# Altium PCB PCB1.PcbDoc
Units mm, origin at the board's own origin, x right, y up, seen from the top; angles counter-clockwise.
Board outline 152.4 x 101.6 mm, 2 copper layers (Top Layer, Bottom Layer); 45 components, 69 nets, 276 pads, 57 vias.
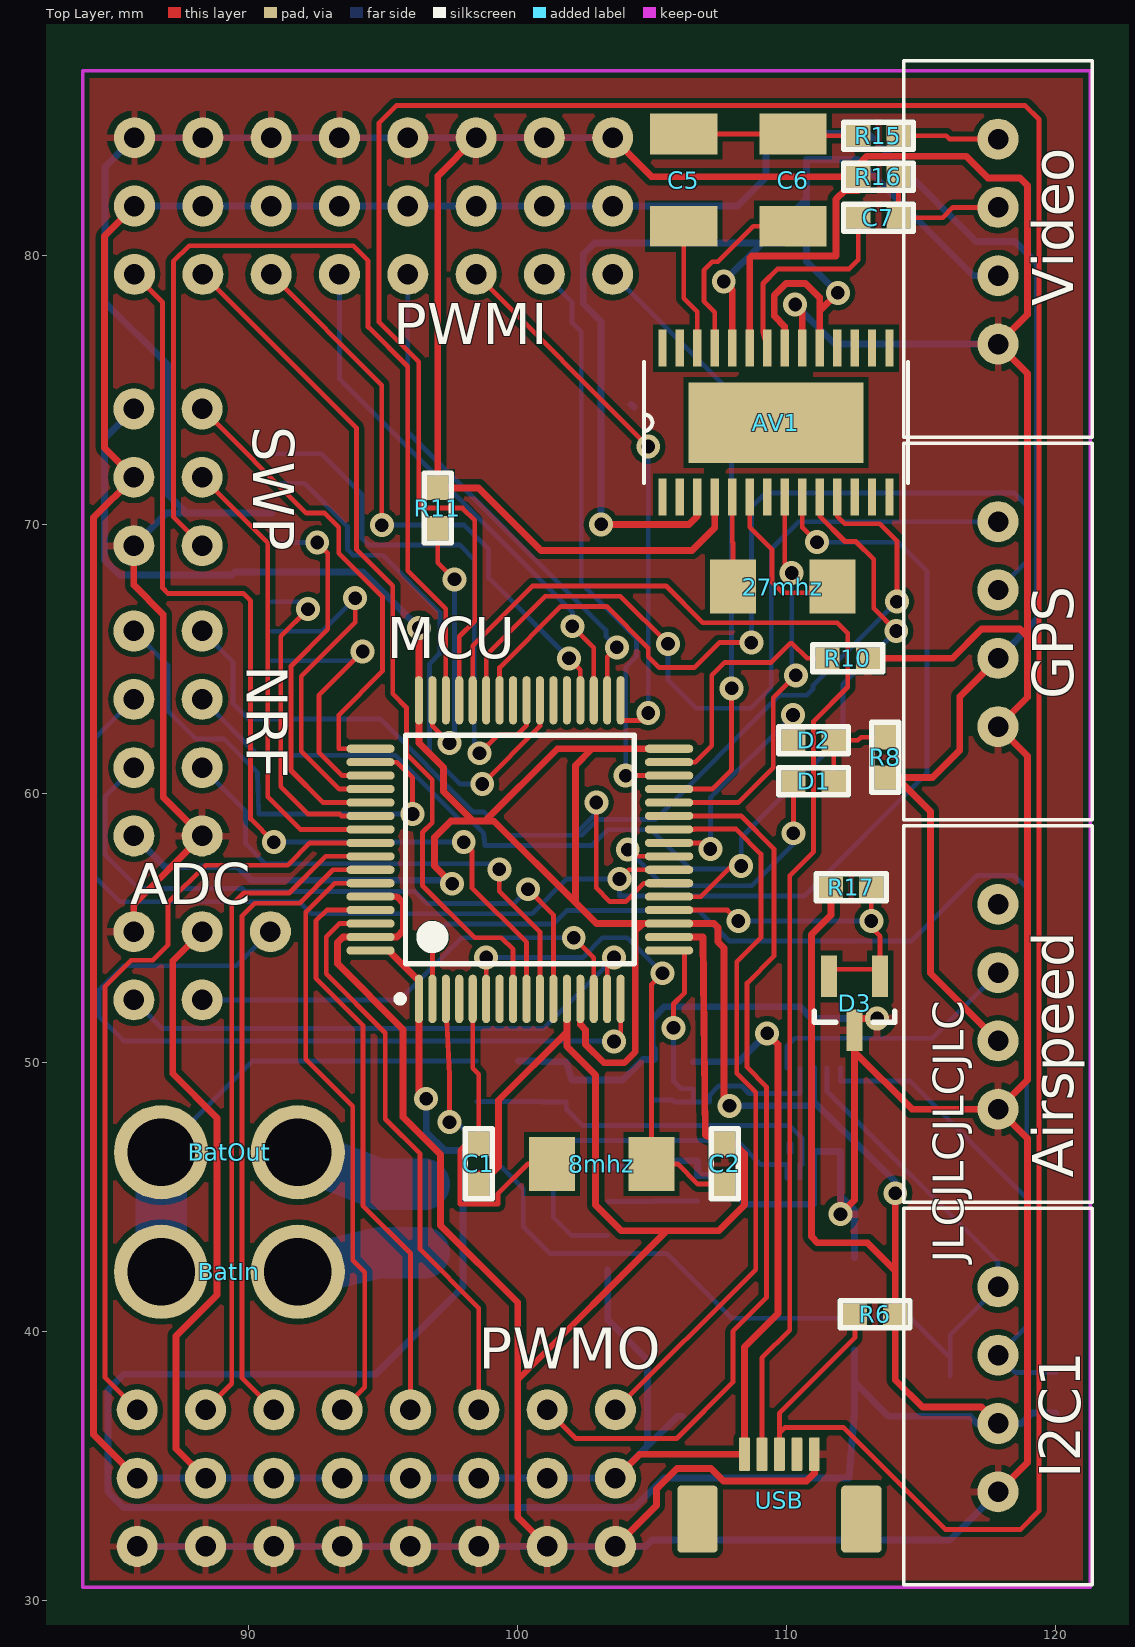
[diagram p0: Top Layer view]
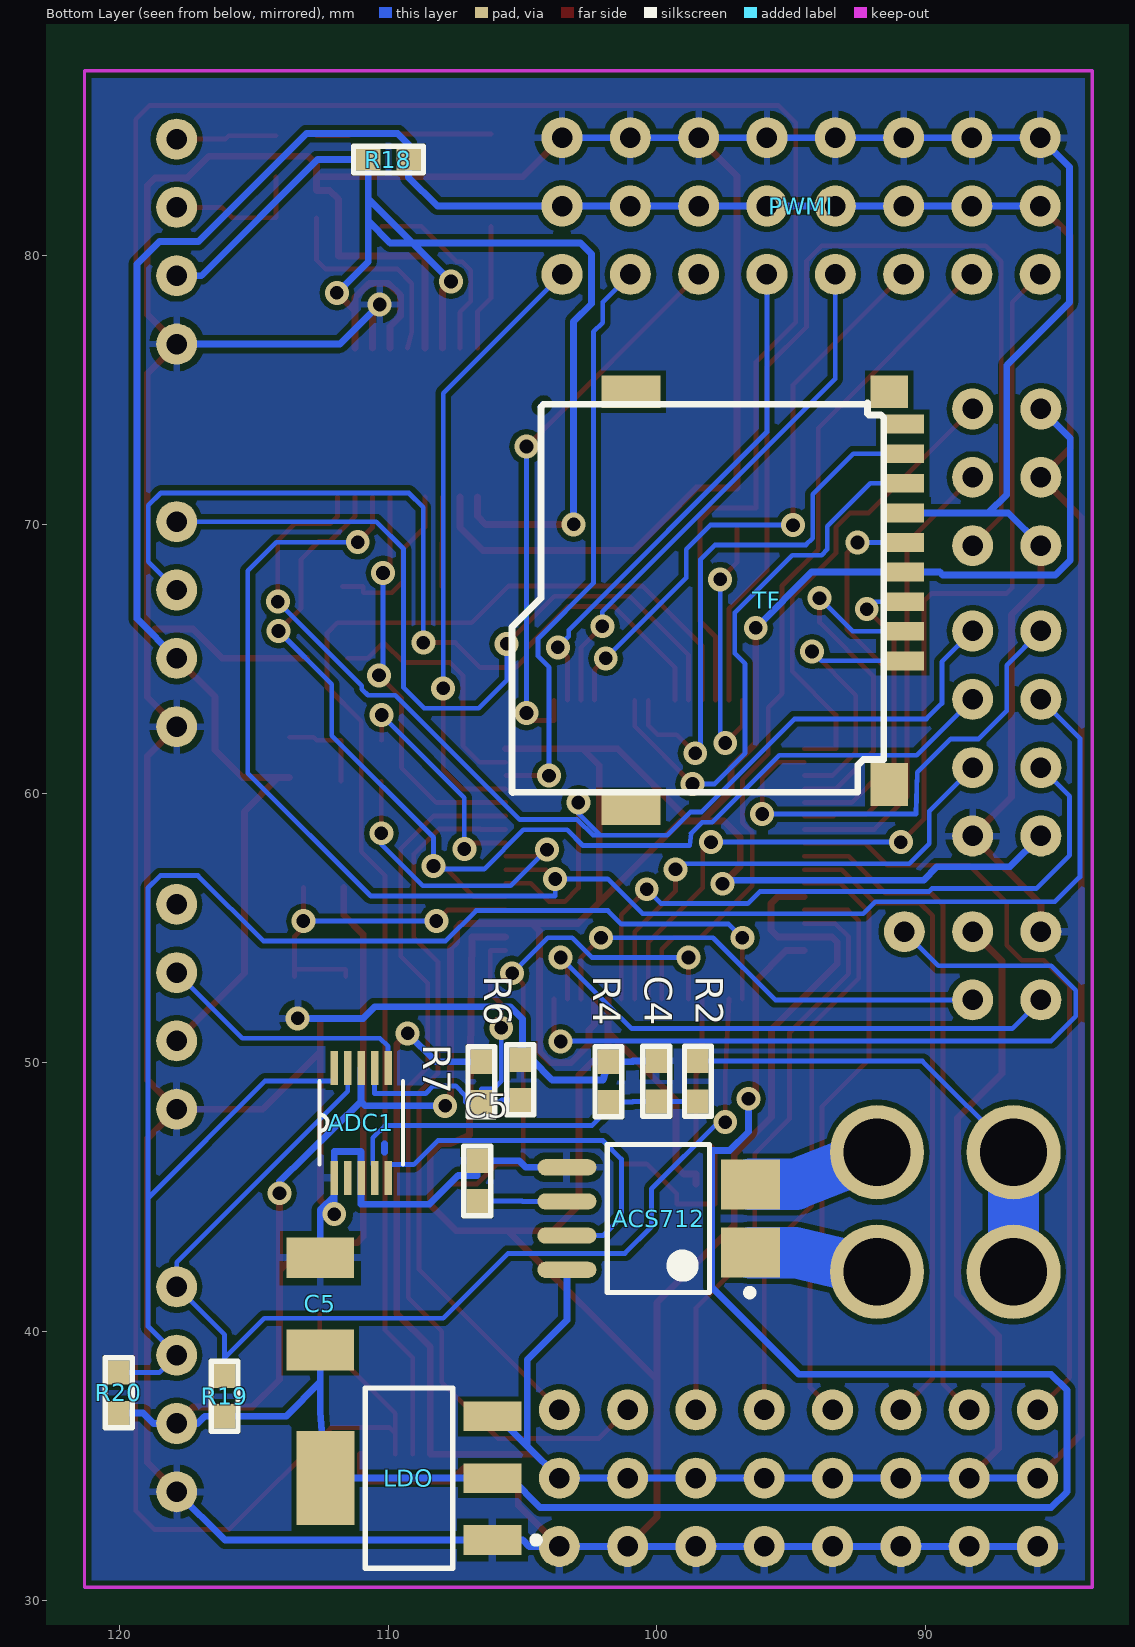
[diagram p1: Bottom Layer view, seen from below]

## Layer stack, top to bottom
Top Layer: signal copper 0.0356
Dielectric: dielectric 0.32, FR-4, Dk 4.8
Bottom Layer: signal copper 0.0356

## Board outline
25.4,25.4 177.8,25.4 177.8,127 25.4,127

## Design rules (kind name [scope] priority, off if disabled: settings)
Clearance [All] p1: gap=0.203
PolygonConnect [All] p1: connectstyle=Relief reliefconductorwidth=0.254 reliefentries=4 polygonreliefangle="90 Angle" airgapwidth=0.254
RoomDefinition Sheet1 [InComponentClass('Sheet1')] p1: confinementstyle=ConfineIn formatcopy=TRUE lockcomponents=FALSE outline 178.943,26.797 200.279,26.797 200.279,43.307 178.943,43.307
RoutingVias [All] p1: holewidth=0.508 width=0.889 viastyle="Through Hole" minholewidth=0.508 minwidth=0.889 maxholewidth=0.508 maxwidth=0.889
SolderMaskExpansion [All] p1: expansion=0.102
Width Current+ [InNet('NetACS712_I+')] p1: maxlimit=2.54 minlimit=1.524 preferedwidth=1.905
Width Current+_1 [InNet('NetACS712_I-')] p2: maxlimit=2.54 minlimit=1.524 preferedwidth=1.905
Width GND [InNet('GND')] p3: maxlimit=0.381 minlimit=0.254 preferedwidth=0.254
Width VCC [InNet('VCC')] p4: maxlimit=0.381 minlimit=0.254 preferedwidth=0.254
Width VCC5V [InNet('VCC5V')] p5: maxlimit=0.381 minlimit=0.254 preferedwidth=0.254
Width VCC5V_2 [InNet('VCC5V-2')] p6: maxlimit=0.381 minlimit=0.254 preferedwidth=0.254
Width [All] p7: maxlimit=1.524 minlimit=0.152 preferedwidth=0.178 checkconnectedcopper=TRUE
28 further rules are at their usual default settings.

## Classes and differential pairs
component class Sheet1: 8mhz 27mhz ACS712 ADC ADC1 Airspeed AV1 BatIn BatOut C1 C2 C4 C5 C6 C7 D1 D2 D3 GPS I2C1 LDO MCU NRF PWMI PWMO R2 R4 R6 R7 R8 R10 R11 R15 R16 R17 R18 R19 R20 SWP TF USB Video

## Components (designator, comment, footprint, x,y, rotation, side; value= is the part's Value field where it differs from the comment)
8mhz "XTAL" 5032 103.124,46.228 r180 top
27mhz "XTAL" 5032 109.855,67.691 r0 top
ACS712 "ACS712" ACS712\ 99.949,44.196 r0 bottom
ADC "5P" 5P-2 85.725,52.324 r0 top (schematic designator *)
ADC1 "ADS1115_10VSSOP" 10VSSOP 110.998,47.752 r90 bottom
Airspeed "4PSocket" 4pSocket 117.856,50.8 r90 top
AV1 "MAX7456" 28TSSOP 109.601,73.787 r90 top (schematic designator *)
BatIn "BatteryAWG12" Battery_AWG12 89.281,42.215 r0 top
BatOut "BatteryAWG12" Battery_AWG12 89.281,46.66 r0 top
C1 "" 0603 98.552,46.228 r90 top
C2 "" 0603 107.696,46.228 r270 top
C4 "" 0603 100.025,49.301 r270 bottom
C5 "" 1210 106.172,82.804 r90 top
C5 "" 0603 106.68,45.593 r270 bottom
C5 "Cap" 1210 112.522,41.021 r270 bottom
C6 "" 1210 110.236,82.804 r90 top
C7 "" 0603 113.411,81.407 r0 top
D1 "Diode 1N5402" 0603 110.998,60.452 r180 top
D2 "Diode 1N5402" 0603 110.998,61.976 r180 top
D3 "TL431" TL431 112.522,52.197 r270 top
GPS "4PSocket" 4pSocket 117.856,65.024 r90 top
I2C1 "4PSocket" 4pSocket 117.856,36.576 r90 top
LDO "AMS1117" SOT-223 109.22,34.544 r90 bottom
MCU "STM32F103R8T6" LQFP64_N 100.076,57.912 r90 top
NRF "NRF24L01Connector" NRF24L01Pad 88.265,58.42 r0 top
PWMI "PWMConector" PWMConnector 85.75,79.299 r0 bottom
PWMO "PWMConector" PWMConnector 85.852,37.084 r0 top
R2 "" 0603 98.476,49.301 r90 bottom
R4 "" 0603 101.803,49.276 r270 bottom
R6 "" 0603 113.284,40.64 r0 top
R6 "" 0603 105.08,49.352 r270 bottom
R7 "" 0603 106.528,49.276 r90 bottom
R8 "" 0603 113.665,61.341 r270 top
R10 "" 0603 112.268,65.024 r0 top
R11 "" 0603 97.028,70.612 r90 top
R15 "" 0603 113.411,84.455 r0 top
R16 "" 0603 113.411,82.931 r0 top
R17 "" 0603 112.395,56.515 r180 top
R18 "" 0603 109.982,83.566 r0 bottom
R19 "" 0603 116.078,37.592 r90 bottom
R20 "" 0603 120.015,37.719 r90 bottom
SWP "SWPConnector" SWPConnector 85.725,71.755 r90 top
TF "TF" TF 100.965,74.93 r270 bottom
USB "USB Micro Type B" USB 109.728,32.512 r90 top
Video "4PSocket" 4pSocket 117.856,79.248 r90 top

## Footprints (in the part's own frame and the unit in brackets; to place one, negate y for a bottom-side part, rotate by r counter-clockwise, add the part's x,y. Pads: shape width x height; smd on the part's side, far side on the other; paste and mask are expansions set on the pad)
4pSocket [mil]
  round 60 hole 30: 1(-100,0) 2(0,0) 3(100,0) 4(200,0)
  silkscreen extent -236,-138 315,138
5P-2 [mil]
  round 60 hole 30: 1(200,100) 2(0,0) 3(100,0) 4(0,100) 5(100,100)
10VSSOP [mil]
  rect 50x11 smd: 1(-80.5,39.37) 2(-80.5,19.68) 3(-80.5,0) 4(-80.5,-19.69) 5(-80.5,-39.37) 6(80.5,-39.37) 7(80.5,-19.69) 8(80.5,0) 9(80.5,19.68) 10(80.5,39.37)
  silkscreen extent -61,-61 61,61
28TSSOP [mil]
  rect 118.11x255.91 smd: 0(0,0)
  rect 54x12 smd: 1(-109,166.34) 2(-109,140.75) 3(-109,115.16) 4(-109,89.57) 5(-109,63.98) 6(-109,38.39) 7(-109,12.8) 8(-109,-12.8) 9(-109,-38.39) 10(-109,-63.98) 11(-109,-89.57) 12(-109,-115.16) 13(-109,-140.75) 14(-109,-166.34) 15(109,-166.34) 16(109,-140.75) 17(109,-115.16) 18(109,-89.57) 19(109,-63.98) 20(109,-38.39) 21(109,-12.8) 22(109,12.8) 23(109,38.39) 24(109,63.98) 25(109,89.57) 26(109,115.16) 27(109,140.75) 28(109,166.34)
  silkscreen extent -89,-193 89,193
0603 [mm]
  rect 0.9x0.8 smd: 1(-0.75,0) 2(0.75,0)
  silkscreen extent -1.3,-0.5 1.3,0.5
1210 [mm]
  rect 1.52x2.5 smd: 1(-1.715,0) 2(1.715,0)
5032 [mm]
  rect 1.7x2 smd: 1(-1.85,0) 2(1.85,0)
ACS712\ [mm] "8-Pin Small Outline Package 1.27 mm Pitch, IPC Medium Density"
  rect 2.2x1.854 smd: 2(-3.429,1.27) 4(-3.429,-1.27)
  oval 2.2x0.6 smd: 5(3.4,-1.905) 6(3.4,-0.635) 7(3.4,0.635) 8(3.4,1.905)
  silkscreen extent -3.52,-2.75 1.9,2.88, body extent -2.73,-2.75 2.73,2.75, height 2.03
Battery_AWG12 [mm]
  round 3.5 hole 2.5: 1(-2.54,0) 2(2.54,0)
LQFP64_N [mm]
  oval 1.8x0.3 smd: 1(-5.55,3.75) 2(-5.55,3.25) 3(-5.55,2.75) 4(-5.55,2.25) 5(-5.55,1.75) 6(-5.55,1.25) 7(-5.55,0.75) 8(-5.55,0.25) 9(-5.55,-0.25) 10(-5.55,-0.75) 11(-5.55,-1.25) 12(-5.55,-1.75) 13(-5.55,-2.25) 14(-5.55,-2.75) 15(-5.55,-3.25) 16(-5.55,-3.75) 33(5.55,-3.75) 34(5.55,-3.25) 35(5.55,-2.75) 36(5.55,-2.25) 37(5.55,-1.75) 38(5.55,-1.25) 39(5.55,-0.75) 40(5.55,-0.25) 41(5.55,0.25) 42(5.55,0.75) 43(5.55,1.25) 44(5.55,1.75) 45(5.55,2.25) 46(5.55,2.75) 47(5.55,3.25) 48(5.55,3.75)
  oval 0.3x1.8 smd: 17(-3.75,-5.55) 18(-3.25,-5.55) 19(-2.75,-5.55) 20(-2.25,-5.55) 21(-1.75,-5.55) 22(-1.25,-5.55) 23(-0.75,-5.55) 24(-0.25,-5.55) 25(0.25,-5.55) 26(0.75,-5.55) 27(1.25,-5.55) 28(1.75,-5.55) 29(2.25,-5.55) 30(2.75,-5.55) 31(3.25,-5.55) 32(3.75,-5.55) 49(3.75,5.55) 50(3.25,5.55) 51(2.75,5.55) 52(2.25,5.55) 53(1.75,5.55) 54(1.25,5.55) 55(0.75,5.55) 56(0.25,5.55) 57(-0.25,5.55) 58(-0.75,5.55) 59(-1.25,5.55) 60(-1.75,5.55) 61(-2.25,5.55) 62(-2.75,5.55) 63(-3.25,5.55) 64(-3.75,5.55)
  silkscreen extent -5.67,-4.25 4.25,4.57
NRF24L01Pad [mil]
  round 60 hole 30: 1(0,0) 2(-100,0) 3(0,100) 4(-100,100) 5(0,200) 6(-100,200) 7(0,300) 8(-100,300)
PWMConnector [mil]
  round 60 hole 30: 1(0,0) 2(100,0) 3(200,0) 4(300,0) 5(400,0) 6(500,0) 7(600,0) 8(700,0) GND(0,-200) GND(100,-200) GND(200,-200) GND(300,-200) GND(400,-200) GND(500,-200) GND(600,-200) GND(700,-200) VCC5V(0,-100) VCC5V(100,-100) VCC5V(200,-100) VCC5V(300,-100) VCC5V(400,-100) VCC5V(500,-100) VCC5V(600,-100) VCC5V(700,-100)
SOT-223 [mm] "SOT-223/SC-73; 4 Leads; Body 6.7 x 7.3 mm, inc. leads (LxW max)"
  rect 1.1x2.15 smd: 1(-2.3,-3.1) 2(0,-3.1) 3(2.3,-3.1)
  rect 3.5x2.15 smd: 4(0,3.1)
  silkscreen extent -3.35,-4.85 3.35,1.62
SWPConnector [mil]
  round 60 hole 30: 1(-100,0) 2(0,0) 3(100,0) 4(-100,-100) 5(0,-100) 6(100,-100)
TF [mm]
  rect 0.7x1.6 smd: 1(10,10.1) 2(8.9,10.1) 3(7.8,10.1) 4(6.7,10.1) 5(5.6,10.1) 6(4.5,10.1) 7(3.4,10.1) 8(2.3,10.1) 9(1.2,10.1)
  rect 1.2x2.2 smd: SHELL(0,0) SHELL(15.5,0)
  rect 1.2x1.4 smd: SHELL(0,9.6)
  rect 1.6x1.4 smd: SHELL(14.6,9.6)
  Top Layer lines w0.254: 0.457,-3.251 0.559,-3.353
  silkscreen extent 0.41,-4.42 14.9,9.4
TL431 [mm] "SOT23, 3-Leads, Body 2.9x1.3mm, Pitch 0.95mm, Lead Span 2.5mm, IPC Low Density"
  rect 1.546x0.6 smd: 1(-1,0.95) 1(-1,-0.95) 3(1,0)
  silkscreen extent 0.3,-1.5 0.7,1.5, body extent -0.7,-1.5 0.7,1.5, height 1.1
USB [mm]
  round 0.508 on Mech15: 0(-0.508,0)
  rrect20% 1.25x0.4 smd: 1(2.919,1.3) 2(2.919,0.65) 3(2.919,0) 4(2.919,-0.65) 5(2.919,-1.3)
  rrect20% 2.5x1.5 smd: SH(0.508,3.048) SH(0.508,-3.048)

## Part data
8mhz 27mhz: "Crystal Oscillator"
C1 C2: library part Cap, "Capacitor"
C4 C5 C5 C6 C7: library part "Cap Semi", "Capacitor (Semiconductor SIM Model)"
C5: "Capacitor"
D1 D2: "3 Amp General Purpose Rectifier"
D3: library part "Diode BAT17", "Silicon RF Schottky Diode for Mixer Applications in the VHF/UHF Range"
MCU: "STM32 ARM-based 32-bit MCU with 64 Kbytes Flash, 64-pin LQFP, Industrial Temperature"
R2 R4 R6 R6 R7 R8 R10 R11 R15 R16 R17 R18 R19 R20: library part Res2, "Resistor"
USB: library part USB_Micro_TypeB, "Connector SMD USB Micro Type B middle mount"

## Via types
v1: diameter 0.889, hole 0.508, Top Layer to Bottom Layer, 57 vias

## Nets (pads, with @x,y where several pads share a name; then routed paths per layer and width w, separated by ;. In a path a pad name is that pad's centre, name@x,y a point inside that pad or via, vN(x,y) a via of type N, cw(c..) or ccw(c..) an arc to the next point about the centre after c; other vN are vias at no path point)
GND: ACS712.5 ADC1.1 ADC1.3 ADC.4 Airspeed.1 AV1.4 AV1.20 AV1.23 C1.1 C2.1 C4.1 C5.1@106.68,46.343 C5.1@112.522,42.736 D3.3 GPS.1 I2C1.1 LDO.1 MCU.12 MCU.18 MCU.60 MCU.63 NRF.1 PWMI.GND PWMO.GND R4.1 R6.1@105.08,50.102 R10.2 R11.2 R16.1 SWP.1 TF.6 USB.5 Video.1 | length 339.7
  Top Layer w0.254: ADC.4 85.725,55.88 NRF.1 86.817,59.868 86.817,66.65 85.725,67.742 SWP.1 ; MCU.60 95.504,56.162 95.758,55.908 95.758,54.916 95.504,54.662 MCU.63 93.497,54.662 93.296,54.46 93.296,53.67 95.737,51.229 95.737,47.963 97.13,46.571 97.13,43.942 100,41.072 100,38.202 ; PWMI.GND@98.45,84.379 97.028,82.956 R11.2 98.539,71.362 100.863,69.037 106.477,69.037 107.326,69.886 AV1.4 ; C1.1 98.552,45.847 99.009,45.847 99.289,46.126 99.289,48.593 101.826,51.13 ; PWMO.GND@101.092,32.004 100,33.096 100,38.202 ; MCU.12 101.826,51.13 ; PWMI.GND@103.53,84.379 104.978,82.931 R16.1 ; PWMO.GND@103.632,32.004 105.156,33.528 105.156,34.138 105.921,34.902 107.185,34.902 107.645,34.442 110.744,34.442 111.028,34.726 USB.5 ; MCU.18 106.883,54.662 106.972,47.296 C2.1 108.052,46.978 108.426,46.603 108.426,44.704 107.461,43.739 105.537,43.739 ; AV1.23 108.626,79.911 108.699,79.985 111.836,79.985 111.836,82.093 112.166,82.423 112.661,82.423 R16.1 ; v1(110.312,78.181) 110.576,77.917 AV1.20 ; v1(111.998,44.358) 112.522,44.882 112.522,50.394 ; R10.2 116.154,65.024 117.246,66.116 118.669,66.116 118.948,65.837 ; v1(113.36,51.638) 112.522,51.638 D3.3 112.522,50.394 ; I2C1.1 118.948,35.128 118.948,47.168 Airspeed.1 ; 100,38.202 105.537,43.739 ; 101.826,51.13 101.826,50.599 102.895,49.53 102.895,44.704 103.861,43.739 105.537,43.739 ; 112.522,50.394 114.656,48.26 Airspeed.1 ; R16.1 112.661,83.375 112.979,83.693 116.662,83.693 117.475,82.88 118.669,82.88 118.948,82.601 118.948,77.8 Video.1 118.948,75.616 118.948,65.837 ; Airspeed.1 118.948,49.352 118.948,61.392 GPS.1 118.948,63.576 118.948,65.837
  Bottom Layer w0.254: SWP.1 86.94,70.43 87.685,70.43 ; PWMO.GND@85.852,32.004 88.392,32.004 90.932,32.004 93.472,32.004 96.012,32.004 98.552,32.004 101.092,32.004 103.632,32.004 104.75,32.004 104.99,32.244 LDO.1 116.064,32.244 I2C1.1 ; TF.6 87.685,70.43 ; C4.1 100.889,50.051 100.914,50.026 R4.1 102.006,49.348 103.894,49.348 104.648,50.102 105.08,50.102 105.08,50.495 105.004,50.571 105.004,51.613 105.461,52.07 110.49,52.07 110.922,51.638 v1(113.36,51.638) ; ACS712.5 104.877,46.101 105.119,46.343 106.68,46.343 106.68,45.796 107.391,45.796 108.458,44.729 110.998,44.729 ADC1.3 110.998,46.685 111.998,46.685 ADC1.1 111.998,45.034 ; PWMI.GND@103.53,84.379 100.99,84.379 98.45,84.379 95.91,84.379 93.37,84.379 90.83,84.379 88.29,84.379 85.75,84.379 84.658,83.287 84.658,78.257 86.995,75.921 86.995,71.12 87.685,70.43 ; v1(110.312,78.181) 111.785,76.708 Video.1 ; v1(111.998,44.358) 111.998,45.034 ; C5.1@112.522,42.736 112.522,44.51 111.998,45.034
Net8mhz_1: 8mhz.1 C2.2 MCU.6 | length 19.2
  Top Layer w0.178: MCU.6 v1(98.826,53.899) ; v1(105.385,53.315) 104.974,52.904 8mhz.1 105.943,46.228 106.693,45.478 C2.2
  Bottom Layer w0.178: v1(98.826,53.899) 102.413,53.899 103.149,54.635 104.064,54.635 v1(105.385,53.315)
Net8mhz_2: 8mhz.2 C1.2 MCU.5 | length 12.6
  Top Layer w0.178: MCU.5 98.326,49.781 98.552,49.555 C1.2 98.552,46.939 98.044,46.939 97.841,46.736 97.841,44.736 99.263,44.736 99.263,45.11 100.381,46.228 8mhz.2
Net27mhz_1: 27mhz.1 AV1.5 | length 3.3
  Top Layer w0.178: AV1.5 107.976,69.346 108.005,69.317 27mhz.1
Net27mhz_2: 27mhz.2 AV1.6 | length 6.1
  Top Layer w0.178: AV1.6 108.626,69.901 109.449,69.078 109.449,67.869 109.855,67.462 110.922,67.462 110.922,67.691 27mhz.2
Net*_1: ADC.1 MCU.16 | length 29.5
  Top Layer w0.178: v1(103.581,50.775) 103.826,51.019 MCU.16
  Bottom Layer w0.178: ADC.1 89.535,53.594 85.344,53.594 84.43,52.68 84.43,51.714 85.344,50.8 103.556,50.8 v1(103.581,50.775)
Net*_2: ADC.2 MCU.15 | length 21
  Top Layer w0.178: MCU.15 103.326,53.644 v1(103.581,53.899)
  Bottom Layer w0.178: ADC.2 86.792,51.257 100.94,51.257 v1(103.581,53.899)
Net*_3: ADC.3 MCU.14 | length 17.4
  Top Layer w0.178: v1(102.083,54.635) 102.826,53.892 MCU.14
  Bottom Layer w0.178: ADC.3 95.606,52.324 97.917,54.635 v1(102.083,54.635)
NetACS712_Filter: ACS712.6 C5.2@106.68,44.843 | length 3.3
  Bottom Layer w0.178: ACS712.6 105.004,44.831 105.016,44.843 C5.2@106.68,44.843
NetACS712_I+: ACS712.2 BatIn.2 | length 4.8
  Bottom Layer w1.905: BatIn.2 94.869,42.926 ACS712.2
NetACS712_I-: ACS712.4 BatOut.2 | length 4.9
  Bottom Layer w1.905: BatOut.2 94.844,45.466 ACS712.4
NetACS712_VOUT: ACS712.7 ADC1.5 | length 14.3
  Bottom Layer w0.178: ACS712.7 102.006,43.561 101.321,44.247 101.321,46.406 102.006,47.092 108.153,47.092 109.042,46.203 109.998,46.203 ADC1.5
NetADC1_4: ADC1.4 C4.2 R2.1 R4.2 | length 14.4
  Bottom Layer w0.178: R2.1 C4.2 100.889,48.551 100.914,48.526 R4.2 101.803,48.267 102.42,47.65 110.109,47.65 110.566,47.193 110.566,46.203 110.498,46.203 ADC1.4
NetADC1_6: ADC1.6 Airspeed.3 | length 9.8
  Bottom Layer w0.178: ADC1.6 109.998,50.597 110.303,50.902 115.418,50.902 Airspeed.3
NetADC1_7: ADC1.7 MCU.17 R6.2@105.08,48.602 R7.1 | length 13.9
  Top Layer w0.178: MCU.17 106.197,54.162 106.197,52.578 105.791,52.172 v1(105.791,51.283)
  Bottom Layer w0.178: R6.2@105.08,48.602 105.766,48.602 105.842,48.526 R7.1 ; v1(105.791,51.283) 105.791,49.301 106.07,49.022 106.528,49.022 R7.1 ; ADC1.7 110.498,48.844 108.598,48.844 108.318,49.124 107.48,49.124 107.124,48.768 107.124,48.526 R7.1
NetADC1_9: ADC1.9 I2C1.4 MCU.3 R19.2 | length 42.5
  Top Layer w0.178: MCU.3 97.46,49.523 v1(97.46,47.777)
  Bottom Layer w0.178: v1(97.46,47.777) 97.727,47.777 100.203,45.301 100.203,43.891 101.194,42.901 105.537,42.901 107.95,40.488 114.605,40.488 116.078,39.014 ; ADC1.9 111.498,48.928 117.856,42.57 I2C1.4 116.078,39.878 116.078,39.014 ; R19.2 116.078,39.014
NetADC1_10: ADC1.10 I2C1.3 MCU.2 R20.2 | length 55.9
  Top Layer w0.178: MCU.2 v1(96.826,54.635)
  Bottom Layer w0.178: v1(96.826,54.635) 97.334,55.143 101.321,55.143 101.823,55.646 106.727,55.646 107.854,54.519 114.641,54.519 117.069,56.947 118.466,56.947 118.923,56.49 118.923,44.958 ; ADC1.10 111.998,49.309 114.571,49.309 118.923,44.958 ; R20.2 118.503,38.469 I2C1.3 118.923,40.183 118.923,44.958
NetAV1_8: AV1.8 MCU.28 | length 15
  Top Layer w0.178: MCU.28 108.201,59.662 109.499,60.96 109.499,63.551 v1(110.338,64.389) ; AV1.8 109.926,68.458 v1(110.185,68.199)
  Bottom Layer w0.178: v1(110.185,68.199) 110.185,64.541 v1(110.338,64.389)
NetAV1_9: AV1.9 MCU.23 NRF.6 | length 57.7
  Top Layer w0.178: v1(103.784,56.82) 104.127,57.162 MCU.23 ; AV1.9 110.576,69.891 v1(111.125,69.342)
  Bottom Layer w0.178: NRF.6 84.277,62.052 84.277,56.896 85.204,55.97 91.884,55.97 92.329,55.524 100.533,55.524 101.829,56.82 v1(103.784,56.82) 103.784,56.187 110.645,56.187 115.214,60.757 115.214,68.275 114.148,69.342 v1(111.125,69.342)
NetAV1_10: AV1.10 MCU.21 NRF.5 | length 44.2
  Top Layer w0.178: MCU.21 106.81,56.162 v1@107.953,57.305 ; v1@108.189,57.189 v1@107.953,57.305 ; v1(108.306,57.305) v1@107.953,57.305 ; AV1.10 111.226,70.308 112.166,69.367 112.573,69.367 113.233,68.707 113.233,66.878 v1(114.071,66.04)
  Bottom Layer w0.178: NRF.5 90.343,61.422 95.448,61.422 97.942,58.928 98.323,58.928 98.73,58.522 98.781,58.064 102.757,58.064 103.342,58.649 104.966,58.649 106.426,57.189 v1@108.189,57.189 ; v1(108.306,57.305) 108.306,58.362 112.09,62.147 112.09,64.059 v1(114.071,66.04)
NetAV1_11: AV1.11 MCU.22 NRF.7 | length 47.1
  Top Layer w0.178: v1(102.921,59.665) 102.921,56.49 103.429,55.982 104.011,55.982 104.691,56.662 MCU.22 ; AV1.11 111.876,70.307 112.155,70.028 113.462,70.028 114.097,69.393 v1(114.097,67.132)
  Bottom Layer w0.178: NRF.7 89.408,64.897 89.408,63.348 89.983,62.772 94.886,62.772 98.349,59.309 98.755,59.309 99.619,58.445 102.108,58.445 ; v1(102.921,59.665) 102.921,59.258 102.108,58.445 ; v1(114.097,67.132) 110.973,64.008 110.973,63.881 110.744,63.652 109.728,63.652 105.105,59.03 102.961,59.03 102.376,58.445 102.108,58.445
NetAV1_22: AV1.22 C7.1 | length 7.9
  Top Layer w0.178: AV1.22 109.118,77.145 109.118,78.96 109.66,79.502 112.328,79.502 112.661,79.835 C7.1
NetAV1_25: AV1.25 C6.1 | length 7.1
  Top Layer w0.178: AV1.25 107.326,77.891 106.921,78.295 106.921,79.451 107.239,79.769 107.44,79.769 108.761,81.089 C6.1
NetAV1_26: AV1.26 C5.1@106.172,81.089 | length 4.7
  Top Layer w0.178: C5.1@106.172,81.089 106.172,78.418 106.676,77.915 AV1.26
NetBatIn_1: BatIn.1 BatOut.1 R2.2 | length 17.6
  Bottom Layer w0.178: BatOut.1 90.133,50.051 R2.2
  Bottom Layer w1.905: BatIn.1 BatOut.1
NetC5_2: C5.2@106.172,84.519 C6.2 R15.1 | length 6.5
  Top Layer w0.178: C5.2@106.172,84.519 C6.2 111.404,84.519 111.468,84.455 R15.1
NetC7_2: C7.2 R16.2 Video.3 | length 5.4
  Top Layer w0.178: R16.2 C7.2 115.799,81.407 116.18,81.788 Video.3
NetD1_1: D1.1 D2.1 R8.1 | length 3.5
  Top Layer w0.178: D1.1 D2.1 112.649,61.976 112.764,62.091 R8.1
NetD1_2: D1.2 MCU.24 | length 11.3
  Top Layer w0.178: v1(104.089,57.912) 104.339,57.662 MCU.24 ; v1(110.248,58.522) D1.2
  Bottom Layer w0.178: v1(104.089,57.912) 105.433,56.568 108.701,56.568 110.248,58.115 v1(110.248,58.522)
NetD2_2: D2.2 MCU.25 | length 8.8
  Top Layer w0.178: MCU.25 106.938,58.162 v1(107.163,57.937) ; v1(110.236,62.916) 110.236,61.976 D2.2
  Bottom Layer w0.178: v1(107.163,57.937) 107.163,59.842 v1(110.236,62.916)
NetD3_3: D3.1 MCU.20 R17.1 | length 13.3
  Top Layer w0.178: MCU.20 107.798,55.662 v1(108.204,55.256) ; D3.1@111.572,53.197 111.572,53.468 D3.1@113.472,53.468 ; R17.1 v1(113.145,55.256) 113.145,55.013 113.472,54.686 D3.1@113.472,53.468 ; D3.1@113.472,53.197 D3.1@113.472,53.468
  Bottom Layer w0.178: v1(108.204,55.256) v1(113.145,55.256)
NetGPS_3: GPS.3 MCU.42 | length 32.3
  Top Layer w0.178: MCU.42 99.326,64.68 101.6,66.954 103.302,66.954 104.851,65.405 104.851,65.087 105.258,64.68 106.565,64.68 107.493,65.608 v1(108.687,65.608)
  Bottom Layer w0.178: v1(108.687,65.608) 108.687,70.637 109.22,71.171 118.453,71.171 118.91,70.714 118.91,68.618 GPS.3
NetGPS_4: GPS.4 MCU.43 | length 30
  Top Layer w0.178: MCU.43 98.826,65.146 101.016,67.335 103.815,67.335 v1(105.588,65.563)
  Bottom Layer w0.178: v1(105.588,65.563) 105.588,64.211 106.629,63.17 108.661,63.17 109.423,63.932 109.423,69.088 110.439,70.104 GPS.4
NetMCU_8: MCU.8 PWMI.2 | length 32.6
  Top Layer w0.178: PWMI.2 94.005,73.584 94.005,69.063 95.352,67.716 95.352,63.703 95.86,63.195 95.86,61.468 96.825,60.503 96.825,58.916 96.459,58.55 96.459,56.576 98.4,54.635 99.39,54.635 99.826,54.2 MCU.8
NetMCU_9: MCU.9 PWMI.1 | length 38.7
  Top Layer w0.178: PWMI.1 86.792,78.257 86.792,67.64 86.995,67.437 89.789,67.437 90.068,67.158 90.068,59.055 v1(90.932,58.191) ; v1(97.993,58.191) 98.298,57.887 98.298,56.49 100.326,54.462 MCU.9
  Bottom Layer w0.178: v1(90.932,58.191) v1(97.993,58.191)
NetMCU_10: MCU.10 NRF.3 | length 18.8
  Top Layer w0.178: v1(99.314,57.175) 99.314,56.363 100.826,54.851 MCU.10
  Bottom Layer w0.178: NRF.3 89.88,59.345 89.88,58.126 90.621,57.385 99.104,57.385 v1(99.314,57.175)
NetMCU_11: MCU.11 NRF.4 | length 24.9
  Top Layer w0.178: v1(100.381,56.439) 101.326,55.494 MCU.11
  Bottom Layer w0.178: NRF.4 84.658,59.893 84.658,57.709 85.903,56.464 89.776,56.464 89.89,56.351 96.182,56.351 96.627,55.905 99.847,55.905 v1(100.381,56.439)
NetMCU_26: MCU.26 PWMO.8 | length 27.3
  Top Layer w0.178: PWMO.8 108.845,42.297 108.845,48.889 108.144,49.59 108.144,53.737 109.042,54.635 109.042,57.748 108.116,58.674 106.571,58.674 106.559,58.662 MCU.26
NetMCU_27: MCU.27 PWMO.7 | length 33.7
  Top Layer w0.178: PWMO.7 102.159,36.017 105.905,36.017 108.001,38.113 108.001,40.005 109.245,41.25 109.245,49.098 108.525,49.819 108.525,52.95 109.525,53.95 109.525,57.937 108.3,59.162 MCU.27
NetMCU_29: MCU.29 PWMI.8 | length 22.9
  Top Layer w0.178: MCU.29 107.228,60.162 107.95,60.884 v1(107.95,63.906)
  Bottom Layer w0.178: PWMI.8 107.95,74.879 v1(107.95,63.906)
NetMCU_30: MCU.30 PWMI.7 | length 21.8
  Top Layer w0.178: v1(104.013,60.662) MCU.30
  Bottom Layer w0.178: PWMI.7 102.019,78.27 102.019,77.508 102.362,77.165 102.362,67.818 104.419,65.761 104.419,65.1 104.013,64.694 v1(104.013,60.662)
NetMCU_31: MCU.31 R10.1 | length 9.5
  Top Layer w0.178: MCU.31 106.603,61.162 107.213,61.773 107.213,64.389 107.696,64.872 109.423,64.872 110.138,65.586 110.194,65.586 110.756,65.024 R10.1
NetMCU_33: MCU.33 PWMI.6 | length 20.8
  Top Layer w0.178: PWMI.6 v1(104.851,72.898) ; MCU.33 103.826,62.713 104.572,62.713 v1(104.851,62.992)
  Bottom Layer w0.178: v1(104.851,62.992) v1(104.851,72.898)
NetMCU_34: MCU.34 PWMI.5 | length 19.2
  Top Layer w0.178: MCU.34 103.326,65.074 v1(103.683,65.43)
  Bottom Layer w0.178: PWMI.5 95.91,73.438 103.276,66.072 103.276,65.837 v1(103.683,65.43)
NetMCU_35: MCU.35 PWMI.4 | length 19.8
  Top Layer w0.178: v1(102.032,66.218) 102.826,65.424 MCU.35
  Bottom Layer w0.178: PWMI.4 93.37,75.413 102.032,66.751 v1(102.032,66.218)
NetMCU_36: MCU.36 PWMI.3 | length 22.4
  Top Layer w0.178: PWMI.3 94.945,75.184 v1(94.945,69.977) ; v1(101.905,65.024) 102.326,64.603 MCU.36
  Bottom Layer w0.178: v1(94.945,69.977) 98.013,69.977 98.914,69.076 98.914,68.015 v1(101.905,65.024)
NetMCU_39: MCU.39 TF.7 | length 20.6
  Top Layer w0.178: v1(98.679,60.35) 100.826,62.497 MCU.39
  Bottom Layer w0.178: TF.7 92.071,71.53 93.666,69.936 93.666,69.072 93.878,68.859 94.973,68.859 97.108,66.725 97.108,65.205 96.723,64.821 96.723,61.493 97.866,60.35 v1(98.679,60.35)
NetMCU_40: MCU.40 TF.8 | length 20.5
  Top Layer w0.178: v1(98.577,61.493) 99.269,62.185 99.975,62.185 100.326,62.536 MCU.40
  Bottom Layer w0.178: TF.8 92.699,72.63 94.209,71.12 94.209,69.494 94.463,69.24 97.841,69.24 98.386,68.695 98.386,61.685 v1(98.577,61.493)
NetMCU_44: MCU.44 USB.2 | length 49.5
  Top Layer w0.178: MCU.44 98.326,65.493 100.549,67.716 105.512,67.716 106.883,66.345 111.887,66.345 112.268,65.964 112.268,63.957 110.998,62.687 110.998,57.836 110.109,56.947 110.109,40.045 109.078,39.014 USB.2
NetMCU_45: MCU.45 R6.1@112.534,40.64 USB.3 | length 118.8
  Top Layer w0.178: MCU.45 97.826,65.835 98.4,66.409 98.4,70.155 97.942,70.612 96.317,70.612 96.317,76.048 94.844,77.521 94.844,84.938 95.479,85.573 118.872,85.573 119.38,85.065 119.38,33.325 118.694,32.639 115.9,32.639 112.116,36.424 109.931,36.424 109.728,36.22 ; USB.3 109.728,36.22 ; R6.1@112.534,40.64 112.534,39.763 109.728,36.957 109.728,36.22
NetMCU_46: MCU.46 SWP.4 | length 36.3
  Top Layer w0.178: SWP.4 87.198,70.282 87.198,79.781 87.782,80.366 93.878,80.366 94.437,79.807 94.437,77.347 95.91,75.874 95.91,68.286 97.326,66.871 MCU.46
NetMCU_47: MCU.47 R11.1 | length 10.2
  Top Layer w0.178: MCU.47 96.826,62.508 v1(97.46,61.874) ; R11.1 97.028,68.58 v1(97.65,67.958)
  Bottom Layer w0.178: v1(97.46,61.874) 97.65,62.064 v1(97.65,67.958)
NetMCU_49: MCU.49 SWP.6 | length 17.7
  Top Layer w0.178: SWP.6 92.138,70.422 92.824,70.422 93.345,69.901 93.345,68.936 94.971,67.31 94.971,64.541 93.345,62.916 93.345,61.662 MCU.49
NetMCU_50: MCU.50 NRF.8 | length 18.2
  Top Layer w0.178: MCU.50 95.504,61.162 96.088,60.578 v1(96.088,59.233)
  Bottom Layer w0.178: NRF.8 86.995,64.77 86.995,63.068 88.036,62.027 89.078,62.027 90.322,60.782 90.373,59.233 v1(96.088,59.233)
NetMCU_51: MCU.51 TF.1 | length 10.2
  Top Layer w0.178: v1(94.234,65.278) 92.608,63.652 92.608,61.535 93.481,60.662 MCU.51
  Bottom Layer w0.178: TF.1 93.886,64.93 v1(94.234,65.278)
NetMCU_52: MCU.52 TF.2 | length 13.3
  Top Layer w0.178: v1(93.955,67.259) 93.955,66.36 91.951,64.356 91.951,61.573 93.362,60.162 MCU.52
  Bottom Layer w0.178: TF.2 92.725,66.03 v1(93.955,67.259)
NetMCU_53: MCU.53 TF.5 | length 14.3
  Top Layer w0.178: v1(92.544,69.33) 92.939,68.936 92.939,66.106 91.57,64.737 91.57,60.853 92.761,59.662 MCU.53
  Bottom Layer w0.178: TF.5 v1(92.544,69.33)
NetMCU_54: MCU.54 TF.3 | length 12.3
  Top Layer w0.178: v1(92.202,66.853) 91.189,65.839 91.189,60.249 92.205,59.233 93.37,59.233 93.441,59.162 MCU.54
  Bottom Layer w0.178: TF.3 91.925,67.13 v1(92.202,66.853)
NetMCU_55: MCU.55 SWP.5 | length 17.2
  Top Layer w0.178: SWP.5 90.703,69.317 90.703,59.876 91.918,58.662 MCU.55
NetMCU_56: MCU.56 PWMO.1 | length 29.2
  Top Layer w0.178: PWMO.1 84.658,38.278 84.658,52.832 85.623,53.797 86.436,53.797 86.995,54.356 86.995,55.931 88.395,57.331 91.44,57.331 92.271,58.162 MCU.56
NetMCU_57: MCU.57 PWMO.2 | length 25.1
  Top Layer w0.178: PWMO.2 89.37,38.062 89.37,55.855 89.814,56.299 91.506,56.299 92.869,57.662 MCU.57
NetMCU_58: MCU.58 PWMO.3 | length 24.3
  Top Layer w0.178: PWMO.3 89.751,38.265 89.751,55.448 90.221,55.918 91.887,55.918 93.131,57.162 MCU.58
NetMCU_59: MCU.59 PWMO.4 | length 22.6
  Top Layer w0.178: PWMO.4 94.31,37.922 94.31,42.2 93.863,42.647 93.863,48.362 92.115,50.11 92.115,55.588 93.188,56.662 MCU.59
NetMCU_61: MCU.61 PWMO.5 | length 21.8
  Top Layer w0.178: MCU.61 92.898,55.662 92.496,55.259 92.496,53.132 94.244,51.384 94.244,44.668 96.012,42.901 PWMO.5
NetMCU_62: MCU.62 PWMO.6 | length 21.8
  Top Layer w0.178: MCU.62 93.369,55.162 92.877,54.669 92.877,53.294 95.077,51.094 95.077,47.897 96.368,46.606 96.368,43.053 98.552,40.869 PWMO.6
NetR15_2: R15.2 Video.4 | length 3.7
  Top Layer w0.178: R15.2 115.926,84.455 116.053,84.328 Video.4
VCC: ADC1.8 C5.2@112.522,39.306 I2C1.2 LDO.2 LDO.4 MCU.1 MCU.13 MCU.19 MCU.32 MCU.48 MCU.64 NRF.2 R6.2@114.034,40.64 R17.2 R19.1 R20.1 SWP.3 TF.4 | length 196.2
  Top Layer w0.254: MCU.64 95.199,54.162 96.326,53.035 MCU.1 96.326,48.92 v1(96.596,48.65) ; v1(96.326,66.158) MCU.48 96.326,61.878 97.244,60.96 97.244,60.071 98.336,58.979 ; v1(97.561,56.642) 96.901,57.302 96.901,58.369 97.511,58.979 98.336,58.979 ; MCU.13 102.326,51.41 102.524,51.212 102.524,50.664 103.2,49.987 103.962,49.987 104.369,50.394 104.369,54.883 104.648,55.162 ; MCU.32 102.768,61.662 ; v1(107.874,48.387) 107.671,48.59 107.671,54.254 107.442,54.483 107.442,55.016 107.296,55.162 MCU.19 104.648,55.162 ; R17.2 111.645,55.474 110.922,54.75 110.922,43.523 111.15,43.294 113.005,43.294 114.034,42.266 ; v1(114.034,45.136) 114.034,42.266 ; I2C1.2 117.246,37.186 115.05,37.186 114.034,38.202 114.034,40.64 114.034,42.266 ; 98.336,58.979 98.349,58.966 99.123,58.966 102.146,55.944 ; 98.336,58.979 98.79,58.979 101.473,61.662 102.768,61.662 ; 102.146,55.944 102.928,55.162 104.648,55.162 ; 102.146,55.944 102.146,61.04 102.768,61.662
  Bottom Layer w0.254: NRF.2 86.868,57.277 89.586,57.277 90.093,56.77 97.434,56.77 v1(97.561,56.642) ; SWP.3 84.633,73.203 84.633,68.682 85.192,68.123 89.377,68.123 89.484,68.23 TF.4 94.254,68.23 v1(96.326,66.158) ; v1(96.596,48.65) 96.596,47.422 97.295,46.723 97.968,46.723 97.968,41.656 94.717,38.405 85.344,38.405 84.76,37.821 84.76,34.036 85.344,33.452 104.343,33.452 105.435,34.544 LDO.2 LDO.4 112.522,37.007 112.522,38.112 ; v1(107.874,48.387) 110.846,48.387 110.998,48.539 ; ADC1.8 110.998,48.539 ; C5.2@112.522,39.306 112.522,38.112 ; v1(114.034,45.136) 114.034,45.58 110.998,48.539 ; R20.1 119.113,36.969 118.72,36.576 I2C1.2 117.081,36.576 116.815,36.842 R19.1 113.792,36.842 112.522,38.112
VCC5V: ACS712.8 ADC.5 Airspeed.2 GPS.2 LDO.3 PWMI.VCC5V PWMO.VCC5V R7.2 R8.2 R18.1 SWP.2 USB.1 | length 196.3
  Top Layer w0.254: PWMI.VCC5V@85.75,81.839 84.633,80.721 84.633,72.847 SWP.2 84.226,70.256 84.226,36.17 PWMO.VCC5V@85.852,34.544 ; ADC.5 87.173,53.772 87.173,49.581 88.821,47.932 88.821,41.353 87.3,39.832 87.3,35.636 PWMO.VCC5V@88.392,34.544 ; PWMO.VCC5V@103.632,34.544 104.519,35.431 USB.1 108.428,39.416 109.677,40.665 109.677,50.673 v1(109.271,51.079) ; R8.2 114.085,60.591 ; Airspeed.2 115.341,53.315 115.341,59.334 114.085,60.591 ; GPS.2 116.434,63.602 116.434,61.607 115.418,60.591 114.085,60.591
  Bottom Layer w0.254: PWMI.VCC5V@85.75,81.839 88.29,81.839 90.83,81.839 93.37,81.839 95.91,81.839 98.45,81.839 100.99,81.839 103.53,81.839 108.165,81.839 109.232,82.906 R18.1 109.232,84.125 109.638,84.531 113.03,84.531 117.043,80.518 118.491,80.518 119.329,79.68 119.329,66.497 GPS.2 ; PWMO.VCC5V@85.852,34.544 88.392,34.544 90.932,34.544 93.472,34.544 96.012,34.544 98.552,34.544 101.092,34.544 103.632,34.544 104.826,35.738 ; ACS712.8 103.349,40.415 104.826,38.938 104.826,35.738 ; LDO.3 105.932,36.844 104.826,35.738 ; R7.2 108.217,50.026 v1(109.271,51.079)
VCC5V-2: AV1.3 AV1.19 AV1.21 AV1.24 R18.2 Video.2 | length 51.9
  Top Layer w0.254: v1(103.099,70.002) 106.371,70.002 106.676,70.307 AV1.3 ; v1(107.658,79.032) 107.976,78.714 AV1.24 ; AV1.21 109.926,77.368 109.537,77.757 109.537,78.524 109.976,78.963 110.699,78.963 111.226,78.435 111.226,77.937 ; AV1.19 111.226,77.937 ; v1(111.9,78.611) 111.226,77.937
  Bottom Layer w0.254: v1(103.099,70.002) 103.099,77.546 102.438,78.207 102.438,80.061 102.845,80.467 109.093,80.467 ; v1(107.658,79.032) 109.093,80.467 ; v1(111.9,78.611) 110.732,79.779 110.732,81.28 ; Video.2 116.943,79.248 112.625,83.566 R18.2 110.732,82.106 ; 109.093,80.467 109.919,80.467 110.732,81.28 ; 109.093,80.467 110.732,82.106 ; 110.732,81.28 110.732,82.106
pads on no net: ADC1.2 Airspeed.4 AV1.0 AV1.1 AV1.2 AV1.7 AV1.12 AV1.13 AV1.14 AV1.15 AV1.16 AV1.17 AV1.18 AV1.27 AV1.28 MCU.4 MCU.7 MCU.37 MCU.38 MCU.41 TF.9 TF.SHELL USB.0 USB.4 USB.SH
copper on no net: | length 3.5
  Top Layer w0.254: 86.666,41.859 87.757,42.95 ; 91.821,42.215 93.448,42.215
  Bottom Layer w0.254: 110.125,46.66 110.125,46.977

## Polygon pours and split planes (outlines as drawn)
GND on Bottom Layer "Top Layer-No Net" (solid, pour order 8): 83.82,86.868 121.539,86.868 121.285,86.868 121.285,30.48 83.82,30.48
GND on Top Layer "Top Layer-No Net" (solid, pour order 10): 83.82,30.48 83.82,86.868 121.285,86.868 121.285,30.48

## Keep-outs
Keep-Out Layer:
  lines w0.127: 83.82,30.48 121.285,30.48 121.285,86.868 83.82,86.868 83.82,30.48

## Silkscreen, mask and mechanical layers (free items; w line width, h text height)
Top Overlay:
  text "JLCJLCJLCJLC" at 116.586,42.545 h1.15 r90